# Allegro board OSCILLATOR.brd
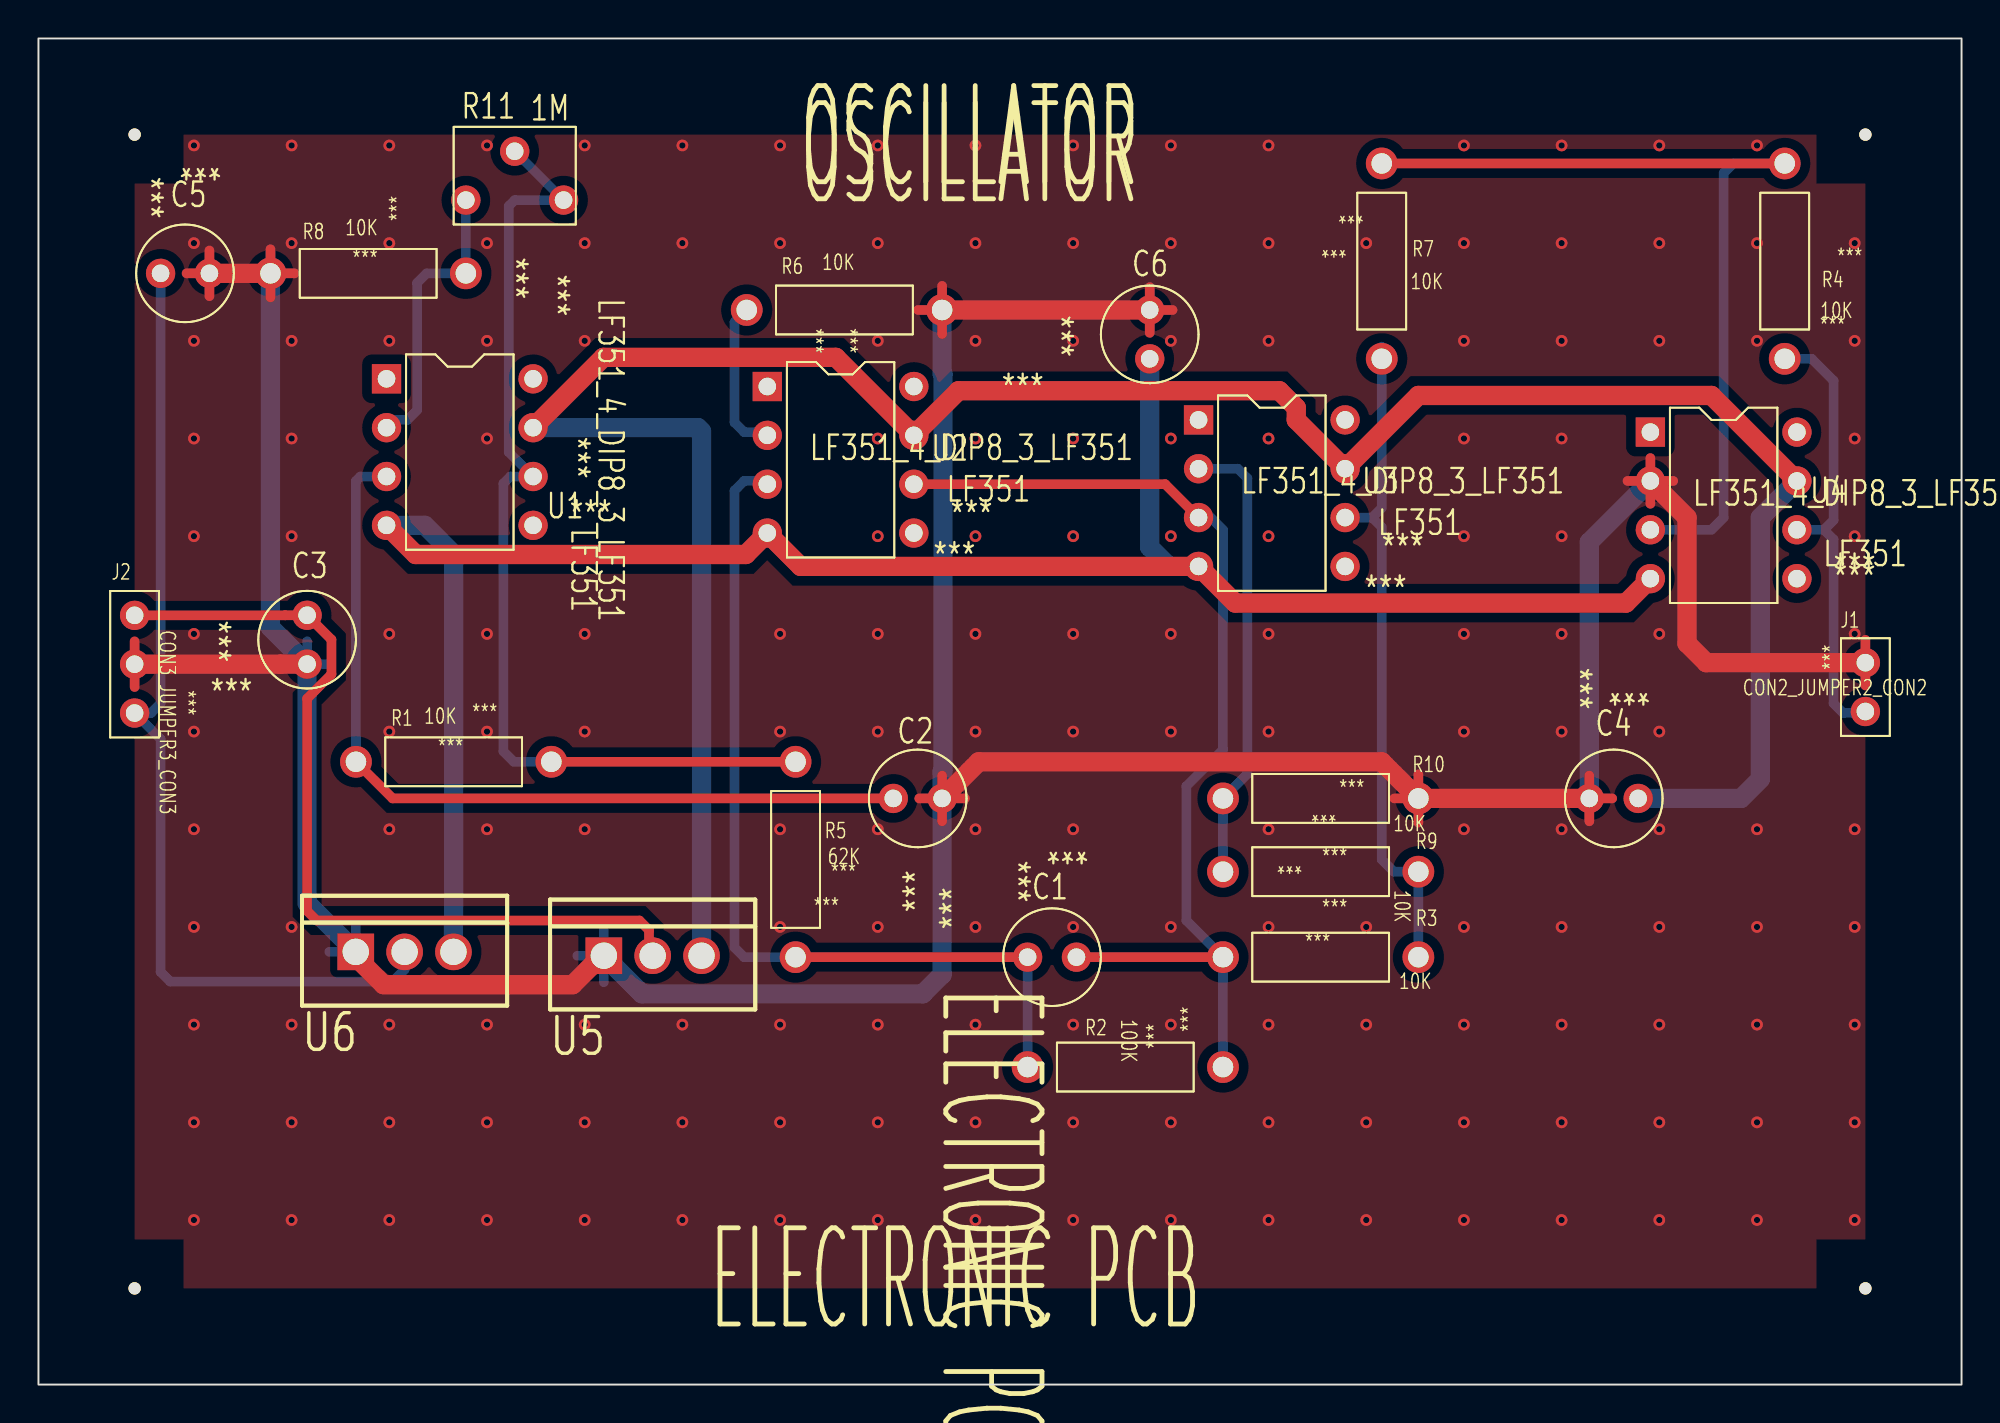
[diagram p0: board, top side]
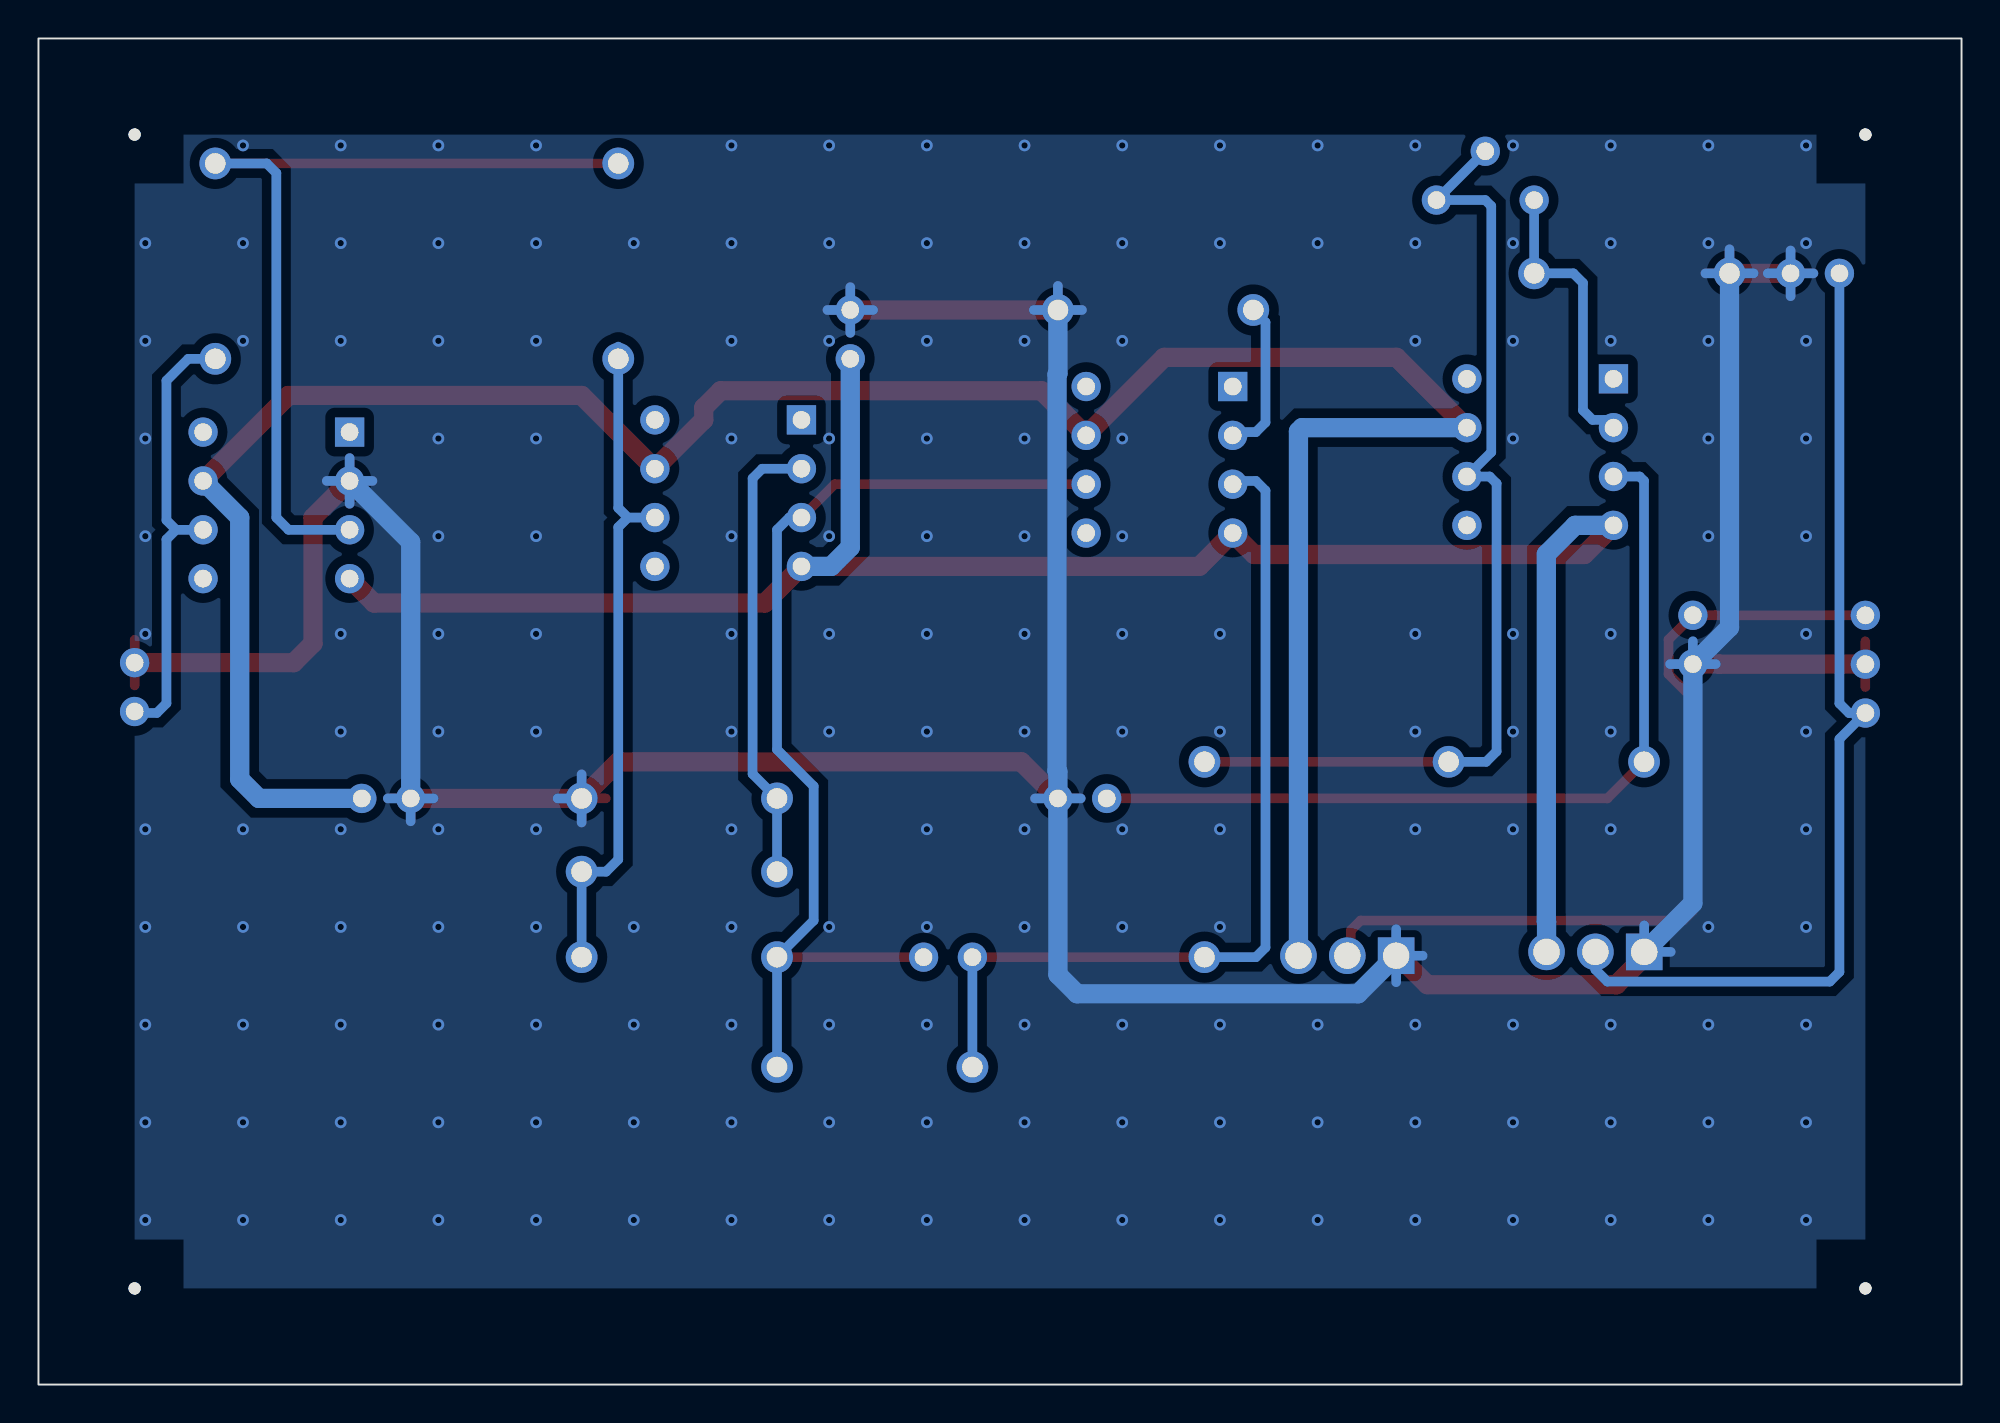
[diagram p1: board, bottom side, seen from below]

Outline 100 x 70 mm; copper layers: TOP, BOTTOM. Coordinates in mm from the lower left corner of the outline.
Outline path: rectangle 0,0 100,70

## Design rules (mm)
constraint set DEFAULT: min track width 0.5, pair gap 0.5
net group POWERNETS: nets +VCC -VCC

## Placement (name value [footprint] x y rotation side)
C1  0.001uF  [CAP196]  51.44 22.23 270 top
C2  270pF  [CAP196]  46.99 30.48 90 top
C3  0.1uF  [CAP196]  13.97 37.47 0 top
C4  0.1uF  [CAP196]  80.64 30.48 270 top
C5  0.1uF  [CAP196]  6.35 57.78 270 top
C6  0.1uF  [CAP196]  57.78 53.34 0 top
J1  CON2  [JUMPER2]  95 35 90 top
J2  CON3  [JUMPER3]  5 40 270 top
NOREF  -  []  0 70 0 top
NOREF#2  -  [unnamed#2]  95 5 0 top
NOREF#3  -  [unnamed#2]  5 65 0 top
NOREF#4  -  []  100 0 90 top
NOREF#5  -  [unnamed#2]  95 65 0 top
NOREF#6  -  [unnamed#2]  5 5 0 top
R1  10K  [RES400]  26.67 32.38 90 top
R2  100K  [RES400]  61.59 16.51 90 top
R3  10K  [RES400]  71.75 22.23 90 top
R4  10K  [RES400]  90.81 53.34 0 top
R5  62K  [RES400]  39.37 22.23 0 top
R6  10K  [RES400]  36.83 55.88 270 top
R7  10K  [RES400]  69.85 63.5 180 top
R8  10K  [RES400]  22.23 57.78 90 top
R9  10K  [RES400]  71.75 26.67 90 top
R10  10K  [RES400]  61.59 30.48 270 top
R11  1M  [RESADJ]  27.3 61.59 270 top
U1  LF351  [DIP8_3]  18.1 52.3 0 top
U2  LF351  [DIP8_3]  37.9 51.9 0 top
U3  LF351  [DIP8_3]  60.33 50.16 0 top
U4  LF351  [DIP8_3]  83.82 49.53 0 top
U5  LM7812C  [TO220AB]  29.4 22.3 0 top
U6  LM7812C  [TO220AB]  16.5 22.5 0 top

## Library data of the parts
C1-C6 = C: Tolerance: ***; User Part Number: ***
J1 = CON2: User Part Number: ***
J2 = CON3: User Part Number: ***
R1-R10 = R: Tolerance: ***; User Part Number: ***
R11 = POT: Tolerance: ***; User Part Number: ***
U1-U4 = LF351_4: Tolerance: ***; User Part Number: ***
U5 U6 = LM7812C_3

## Footprints (pads in the part's own frame, mm; a bottom-side part is the same pattern mirrored in y, then rotated)
CAP196
  round 1.524 hole 0.914: 1(0,0) 2(0,2.54)
DIP8_3
  rect 1.524x1.524 hole 0.914: 1(0,0)
  round 1.524 hole 0.914: 2(0,-2.54) 3(0,-5.08) 4(0,-7.62) 5(7.62,-7.62) 6(7.62,-5.08) 7(7.62,-2.54) 8(7.62,0)
JUMPER2
  round 1.524 hole 0.914: 1(0,0) 2(2.54,0)
JUMPER3
  round 1.524 hole 0.914: 1(0,0) 2(2.54,0) 3(5.08,0)
RES400
  round 1.651 hole 1.067: 1(0,0) 2(0,10.16)
RESADJ
  round 1.524 hole 0.914: 1(0,0) 2(-2.54,-2.54) 3(0,-5.08)
TO220AB
  rect 1.905x1.905 hole 1.372: 1(0,0)
  round 1.905 hole 1.372: 2(2.54,0) 3(5.08,0)
unnamed#2
  round 0.635 hole 3.175 unplated: (0,0)

## Nets
+VCC: C4.2 U1.7 U2.7 U3.7 U4.7 U5.3(OUT)
-VCC: C6.1 U1.4(V-) U2.4(V-) U3.4(V-) U4.4(V-) U6.3(OUT)
GND: C2.1 C3.1 C4.1 C5.2 C6.2 J1.2 J2.2 R6.2 R8.2 R10.2 U4.2 U5.1 U6.1
OUT: J1.1 R4.1 U4.6
SIG: C1.2 R2.1 R3.2 U2.6 U3.3
N00331: R3.1 R7.2 R9.1 U3.6
N00341: R4.2 R7.1 U4.3
N00355: R1.1 R5.2 R11.1 R11.2(WIPER) U1.6
N00365: C1.1 R2.2 R5.1 U2.3
N00373: R6.1 U2.2
N00444: C2.2 R1.2 U1.3
N00474: R8.1 R11.3 U1.2
N00533: R9.2 R10.1 U3.2
N01997: C3.2 J2.1 U5.2
N02040: C5.1 J2.3 U6.2

Pads without a net: U1 1 5 8; U2 1 5 8; U3 1 5 8; U4 1 5 8

## Via types
v1: diameter 0.61, hole 0.33, TOP to BOTTOM, 179 vias

## Routing (per net, layer and track width the routed paths; a pad name or vN(x,y) marks a point on that pad's centre or on a via; arc(x,y) is an arc through that point)
+VCC: length 134.5
  TOP w1: U1.7 29.38,53.42 41.46,53.42 U2.7 47.84,51.68 64.52,51.68 65.41,50.8 65.41,50.16 67.94,47.62 71.75,51.44 87,51.44 U4.7
  BOTTOM w1: U5.3 34.48,49.57 34.29,49.76 U1.7 ; U4.7 89.53,45.09 89.53,31.48 88.53,30.48 C4.2
-VCC: length 106.4
  TOP w1: U1.4 19.62,43.16 36.78,43.16 U2.4 39.63,42.55 U3.4 62.23,40.64 82.55,40.64 U4.4
  BOTTOM w1: U6.3 21.58,24.08 21.59,24.09 21.59,43.18 20.09,44.68 U1.4 ; C6.1 57.78,43.55 58.78,42.55 U3.4
GND: length 278
  TOP w0.5: 12.06,56.53 12.06,57.78 ; 12.06,57.78 13.32,57.78 ; 12.06,57.78 12.06,59.04 ; C4.1 80.64,31.67 ; C4.1 81.83,30.48 ; C4.1 80.64,29.29 ; 8.89,56.6 C5.2 ; C5.2 8.89,58.97 ; C5.2 7.7,57.78 ; 45.8,30.48 C2.1 ; C2.1 46.99,29.29 ; C2.1 48.18,30.48 ; C2.1 46.99,31.67 ; 71.75,29.23 R10.2 ; R10.2 70.5,30.48 ; R10.2 71.75,31.73 ; 5,36.27 J2.2 5,38.65 ; 82.63,46.99 U4.2 ; U4.2 83.82,45.8 ; U4.2 83.82,48.18 ; U4.2 85.01,46.99 ; 95,38.73 J1.2 95,36.35 ; C6.2 57.78,57.07 ; C6.2 57.78,54.69 ; C6.2 58.97,55.88 ; 45.74,55.88 R6.2 ; R6.2 46.99,57.13 ; R6.2 46.99,54.63
  TOP w1: C4.1 R10.2 69.85,32.38 48.9,32.38 C2.1 ; J1.2 86.72,37.54 85.72,38.54 85.72,45.09 U4.2 ; C3.1 12.58,37.47 12.58,37.46 J2.2 ; R6.2 C6.2 ; U5.1 29.29,22.3 27.78,20.79 17.94,20.79 16.5,22.23 U6.1 ; C5.2 12.06,57.78
  BOTTOM w0.5: 28.02,22.3 U5.1 ; U5.1 29.4,20.92 ; U5.1 29.4,23.68 ; 8.89,56.6 C5.2 ; C5.2 8.89,58.97 ; C5.2 10.08,57.78 ; C5.2 7.7,57.78 ; 12.78,37.47 C3.1 ; C3.1 15.16,37.47 ; C3.1 13.97,38.65 ; 15.12,22.5 U6.1 16.5,23.88 ; 56.6,55.88 C6.2 ; C6.2 57.78,57.07 ; C6.2 58.97,55.88 ; C6.2 57.78,54.69 ; 71.75,29.23 R10.2 ; R10.2 71.75,31.73 ; R10.2 73.01,30.48 ; 82.63,46.99 U4.2 ; U4.2 85.01,46.99 ; U4.2 83.82,45.8 ; U4.2 83.82,48.18 ; 45.8,30.48 C2.1 48.18,30.48 ; R6.2 48.24,55.88 ; R6.2 46.99,57.13 ; R6.2 45.74,55.88 ; 79.46,30.48 C4.1 ; C4.1 80.64,29.29 ; C4.1 81.83,30.48 ; 12.06,57.78 13.32,57.78 ; 12.06,57.78 12.06,59.04 ; 12.06,57.78 10.81,57.78
  BOTTOM w1: R6.2 46.99,52.58 47.04,52.53 47.04,31.92 46.99,31.87 C2.1 46.99,21.32 45.99,20.32 31.38,20.32 U5.1 ; C4.1 80.64,43.81 U4.2 ; U6.1 13.97,25.03 C3.1 12.06,39.37 12.06,57.78
  vias: v1(8.08,64.44) v1(8.08,59.36) v1(8.08,54.28) v1(8.08,49.2) v1(8.08,44.12) v1(8.08,39.04) v1(8.08,33.96) v1(8.08,28.88) v1(8.08,23.8) v1(8.08,18.72) v1(8.08,13.64) v1(8.08,8.56) v1(13.16,64.44) v1(13.16,59.36) v1(13.16,54.28) v1(13.16,49.2) v1(13.16,44.12) v1(13.16,23.8) v1(13.16,18.72) v1(13.16,13.64) v1(13.16,8.56) v1(18.24,64.44) v1(18.24,59.36) v1(18.24,54.28) v1(18.24,39.04) v1(18.24,33.96) v1(18.24,28.88) v1(18.24,18.72) v1(18.24,13.64) v1(18.24,8.56) v1(23.32,64.44) v1(23.32,59.36) v1(23.32,54.28) v1(23.32,49.2) v1(23.32,39.04) v1(23.32,33.96) v1(23.32,28.88) v1(23.32,18.72) v1(23.32,13.64) v1(23.32,8.56) v1(28.4,64.44) v1(28.4,59.36) v1(28.4,54.28) v1(28.4,39.04) v1(28.4,33.96) v1(28.4,28.88) v1(28.4,18.72) v1(28.4,13.64) v1(28.4,8.56) v1(33.48,64.44) v1(33.48,59.36) v1(33.48,18.72) v1(33.48,13.64) v1(33.48,8.56) v1(38.56,64.44) v1(38.56,59.36) v1(38.56,39.04) v1(38.56,33.96) v1(38.56,28.88) v1(38.56,23.8) v1(38.56,18.72) v1(38.56,13.64) v1(38.56,8.56) v1(43.64,64.44) v1(43.64,59.36) v1(43.64,54.28) v1(43.64,49.2) v1(43.64,44.12) v1(43.64,39.04) v1(43.64,33.96) v1(43.64,28.88) v1(43.64,23.8) v1(43.64,18.72) v1(43.64,13.64) v1(43.64,8.56) v1(48.72,64.44) v1(48.72,59.36) v1(48.72,54.28) v1(48.72,49.2) v1(48.72,44.12) v1(48.72,39.04) v1(48.72,33.96) v1(48.72,28.88) v1(48.72,23.8) v1(48.72,18.72) v1(48.72,13.64) v1(48.72,8.56) v1(53.8,64.44) v1(53.8,59.36) v1(53.8,54.28) v1(53.8,49.2) v1(53.8,44.12) v1(53.8,39.04) v1(53.8,33.96) v1(53.8,28.88) v1(53.8,23.8) v1(53.8,18.72) v1(53.8,13.64) v1(53.8,8.56) v1(58.88,64.44) v1(58.88,59.36) v1(58.88,54.28) v1(58.88,49.2) v1(58.88,44.12) v1(58.88,39.04) v1(58.88,33.96) v1(58.88,23.8) v1(58.88,18.72) v1(58.88,13.64) v1(58.88,8.56) v1(63.96,64.44) v1(63.96,59.36) v1(63.96,54.28) v1(63.96,49.2) v1(63.96,44.12) v1(63.96,39.04) v1(63.96,33.96) v1(63.96,28.88) v1(63.96,23.8) v1(63.96,18.72) v1(63.96,13.64) v1(63.96,8.56) v1(69.04,59.36) v1(69.04,23.8) v1(69.04,18.72) v1(69.04,13.64) v1(69.04,8.56) v1(74.12,64.44) v1(74.12,59.36) v1(74.12,54.28) v1(74.12,49.2) v1(74.12,44.12) v1(74.12,39.04) v1(74.12,33.96) v1(74.12,28.88) v1(74.12,23.8) v1(74.12,18.72) v1(74.12,13.64) v1(74.12,8.56) v1(79.2,64.44) v1(79.2,59.36) v1(79.2,54.28) v1(79.2,49.2) v1(79.2,44.12) v1(79.2,39.04) v1(79.2,33.96) v1(79.2,28.88) v1(79.2,23.8) v1(79.2,18.72) v1(79.2,13.64) v1(79.2,8.56) v1(84.28,64.44) v1(84.28,59.36) v1(84.28,54.28) v1(84.28,39.04) v1(84.28,33.96) v1(84.28,28.88) v1(84.28,23.8) v1(84.28,18.72) v1(84.28,13.64) v1(84.28,8.56) v1(89.36,64.44) v1(89.36,59.36) v1(89.36,54.28) v1(89.36,28.88) v1(89.36,23.8) v1(89.36,18.72) v1(89.36,13.64) v1(89.36,8.56) v1(94.44,59.36) v1(94.44,54.28) v1(94.44,49.2) v1(94.44,44.12) v1(94.44,39.04) v1(94.44,28.88) v1(94.44,23.8) v1(94.44,18.72) v1(94.44,13.64) v1(94.44,8.56)
OUT: length 23.5
  BOTTOM w0.5: U4.6 92.84,44.45 ; 92.84,44.45 93.34,43.95 93.34,35.42 93.84,34.92 94.92,34.92 J1.1 ; 92.84,44.45 93.34,44.95 93.34,52.2 92.21,53.34 R4.1
SIG: length 54.2
  TOP w0.5: C1.2 R3.2 ; U3.3 58.59,46.82 U2.6
  BOTTOM w0.5: R2.1 R3.2 59.69,24.13 59.69,31.12 61.59,33.02 61.59,44.45 60.96,45.09 U3.3
N00331: length 35.1
  BOTTOM w0.5: 69.35,45.09 67.94,45.09 ; 69.35,45.09 69.85,44.59 69.85,27.3 70.48,26.67 R9.1 R3.1 ; 69.35,45.09 69.85,45.59 R7.2 69.85,53.98
N00341: length 46.3
  TOP w0.5: R7.1 R4.2
  BOTTOM w0.5: U4.3 87,44.45 87.63,45.08 87.63,63 88.13,63.5 R4.2
N00355: length 52.2
  TOP w0.5: R1.1 39.37,32.38
  BOTTOM w0.5: R11.2 R11.1 24.77,61.59 24.45,61.28 24.45,48.49 U1.6 24.54,47.22 24.18,46.86 24.18,32.93 24.72,32.38 R1.1
N00365: length 46.9
  TOP w0.5: R5.1 C1.1
  BOTTOM w0.5: U2.3 37.73,46.99 36.7,46.99 36.2,46.49 36.2,22.73 36.7,22.23 R5.1 ; C1.1 R2.2
N00373: length 8.1
  BOTTOM w0.5: R6.1 36.2,55.24 36.2,50.03 36.7,49.53 37.73,49.53 U2.2
N00444: length 45
  TOP w0.5: C2.2 18.41,30.48 R1.2
  BOTTOM w0.5: U1.3 16.74,47.22 16.51,46.99 R1.2
N00474: length 15.1
  BOTTOM w0.5: R11.3 R8.1 20.18,57.78 19.68,57.28 19.68,50.66 19.18,50.16 18.5,50.16 U1.2
N00533: length 23.7
  BOTTOM w0.5: U3.2 62.37,47.62 62.87,47.12 62.87,31.75 R10.1 R9.2
N01997: length 45
  TOP w0.5: J2.1 12.83,40 12.83,40.01 C3.2 15.24,38.74 15.24,36.94 13.97,35.67 13.97,24.63 14.47,24.13 31.25,24.13 31.75,23.63 31.75,22.49 U5.2
N02040: length 52
  BOTTOM w0.5: U6.2 19.04,21.58 18.41,20.95 6.85,20.95 6.35,21.45 6.35,33.57 J2.3 5.85,34.92 6.35,35.42 C5.1

## Copper pours and planes (outline as drawn; the poured copper is in the pictures)
GND on TOP: 95,5 95,65 5,65 5,5 ; 6 cut-outs
GND on BOTTOM: 95,5 95,65 5,65 5,5 ; 10 cut-outs

## Text on the board
Ref Des/Silkscreen Top: ELECTRONIC PCB | OSCILLATOR
DIMENSION: FIGURE | FINISHED_SIZE | 0.914 | 1.067 | 1.372 | 3.175 | DRILL CHART: TOP to BOTTOM | ALL UNITS ARE IN MILLIMETERS | PLATED | NON-PLATED | QTY | 52 | 20 | 6 | 4
